# Altium PCB PCB1.PcbDoc
Units mil, origin at the board's own origin, x right, y up, seen from the top; angles counter-clockwise.
Board outline 6000 x 4000 mil, 2 copper layers (Top Layer, Bottom Layer); 12 components, 19 nets, 108 pads, 21 vias.
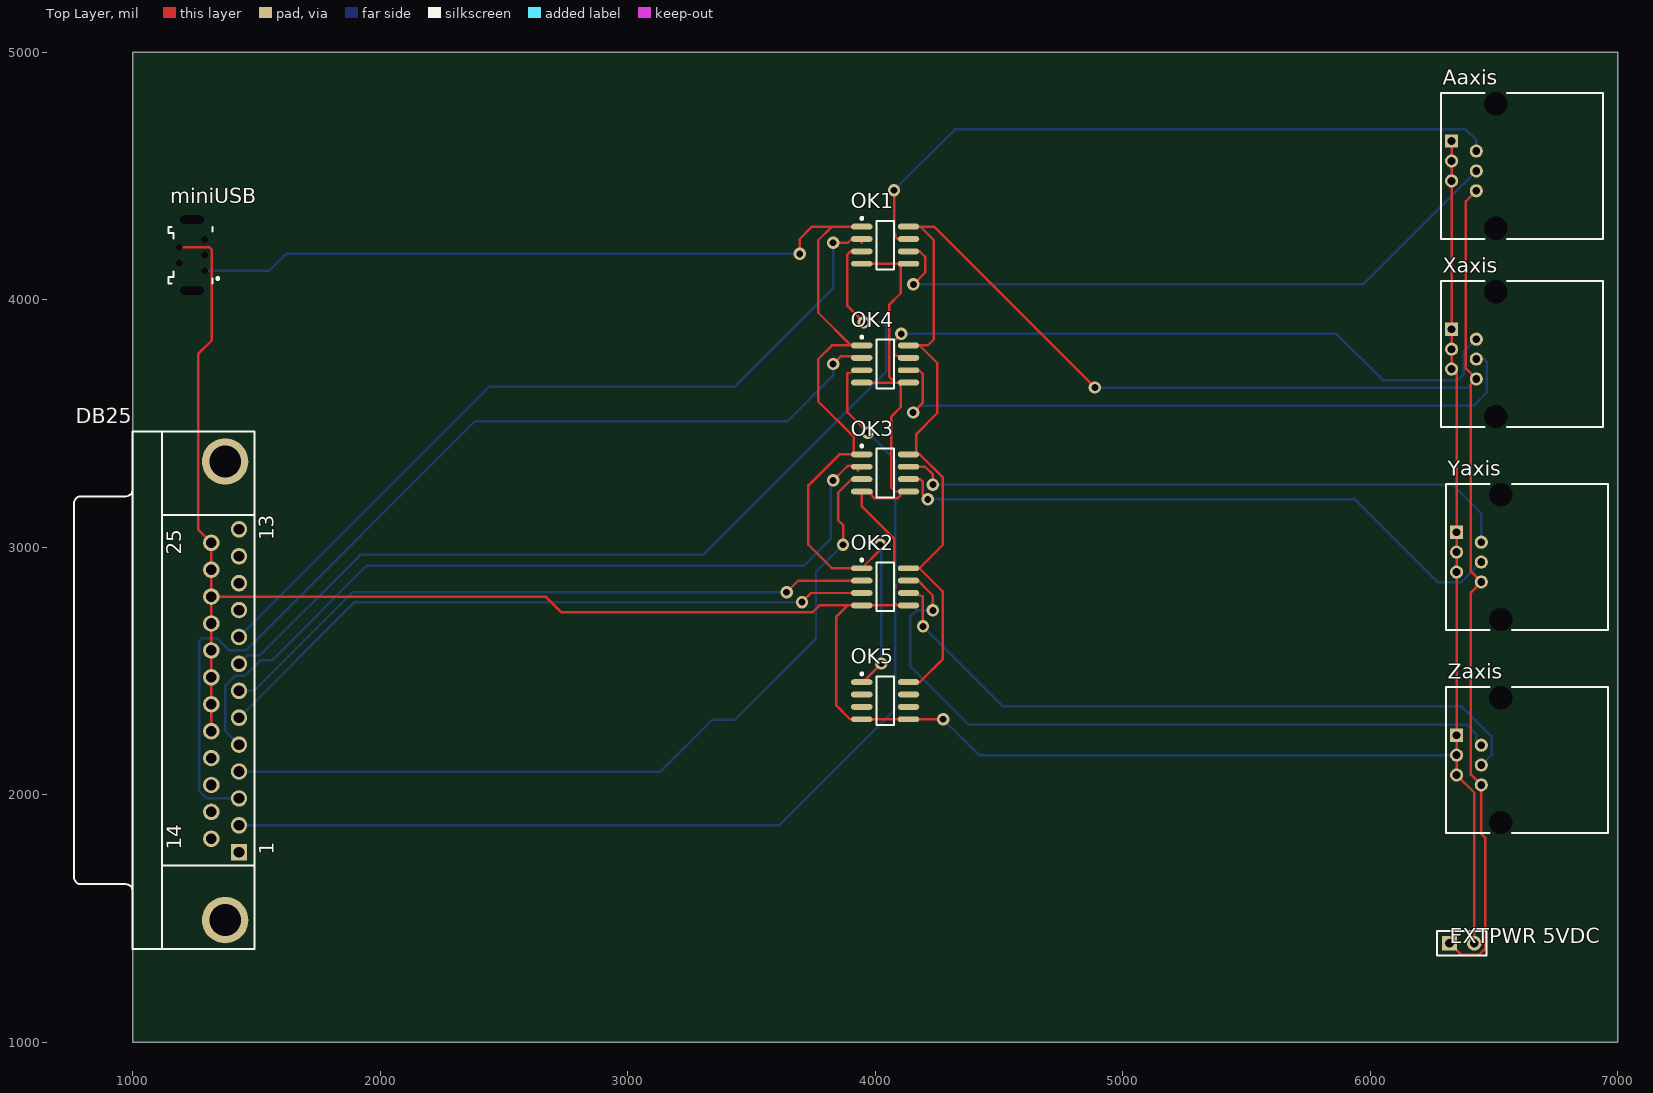
[diagram p0: Top Layer view]
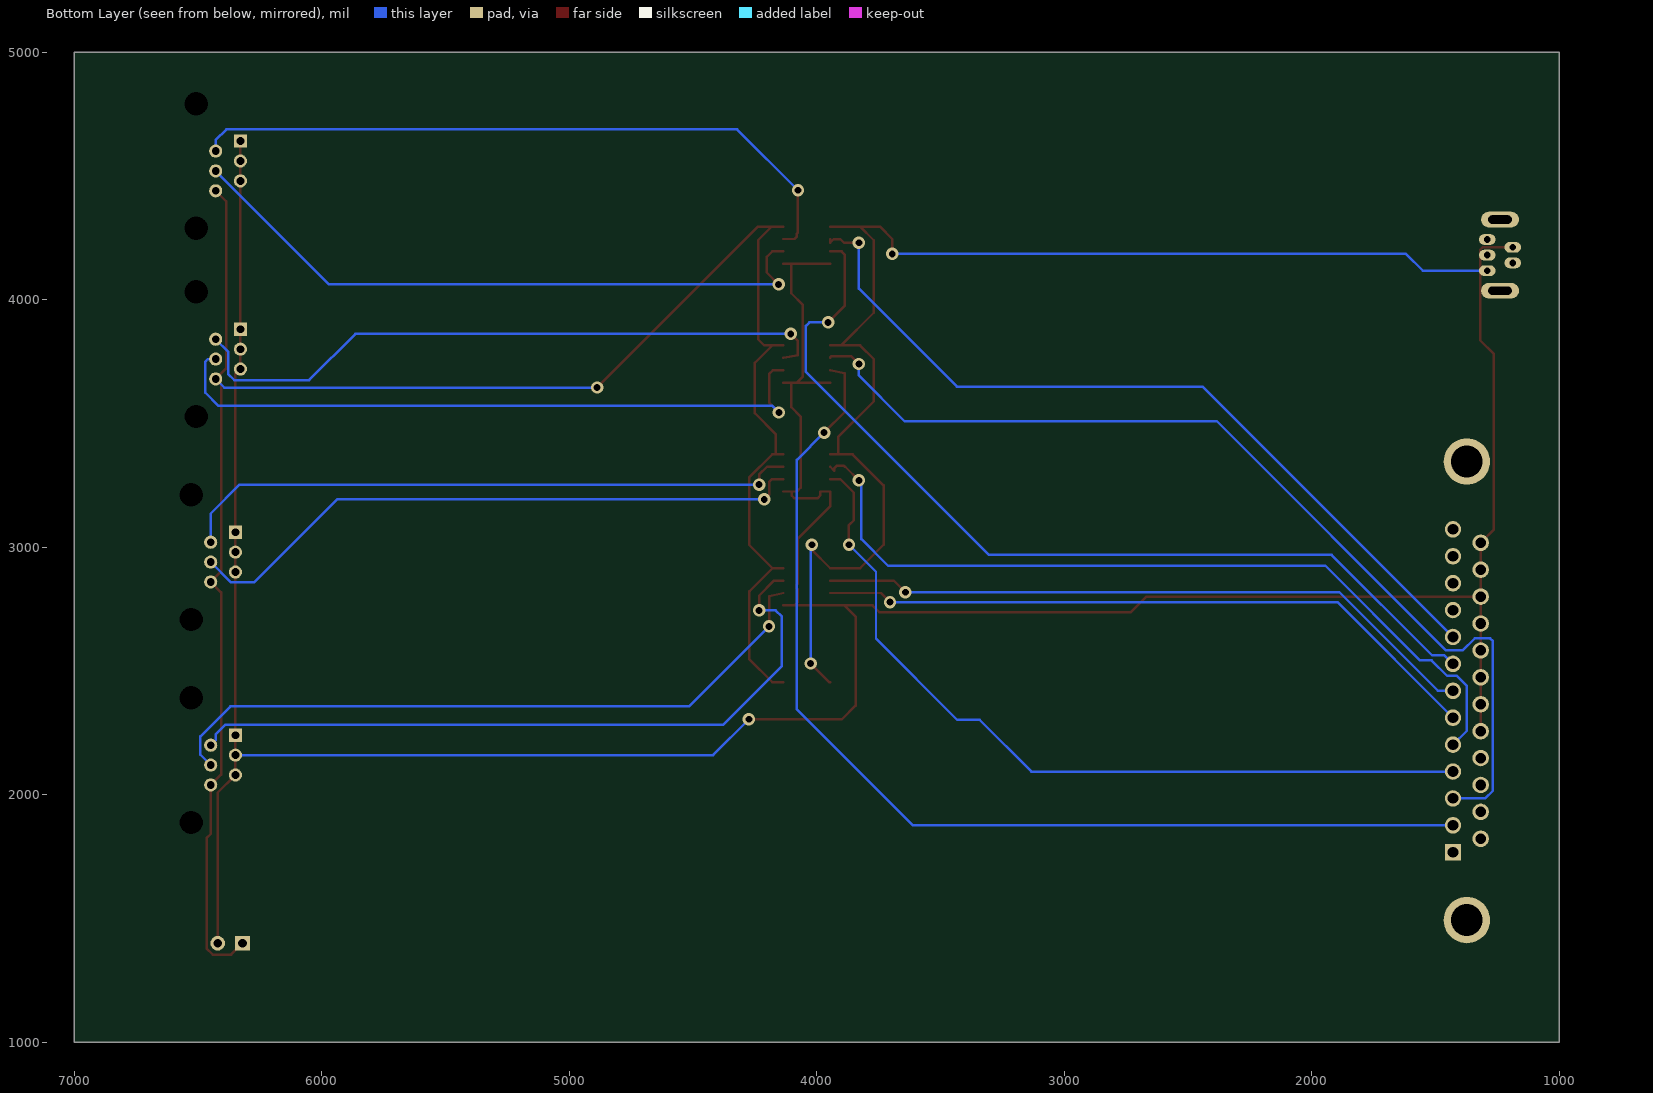
[diagram p1: Bottom Layer view, seen from below]

## Layer stack, top to bottom
Top Layer: signal copper 1.4
Dielectric: dielectric 12.6, FR-4, Dk 4.8
Bottom Layer: signal copper 1.4

## Board outline
1000,1000 7000,1000 7000,5000 1000,5000

## Design rules (kind name [scope] priority, off if disabled: settings)
Clearance [All] p1: gap=10
PolygonConnect [All] p1: connectstyle=Relief reliefconductorwidth=10 reliefentries=4 polygonreliefangle="90 Angle"
RoomDefinition Sheet1 [InComponentClass('Sheet1')] p1: confinementstyle=ConfineIn formatcopy=TRUE lockcomponents=FALSE outline 0,0 2000,0 2000,1000 0,1000
RoutingVias [All] p1: holewidth=28 width=50 viastyle="Through Hole" minholewidth=28 minwidth=50 maxholewidth=28 maxwidth=50
SilkscreenOverComponentPads [All] p1: minsilkscreentomaskgap=10
SolderMaskExpansion [All] p1: expansion=4
Width [All] p1: maxlimit=10 minlimit=10 preferedwidth=10
27 further rules are at their usual default settings.

## Components (designator, comment, footprint, x,y, rotation, side; value= is the part's Value field where it differs from the comment)
Aaxis "52830-6615" 52830-6615 6940,4540 r90 top
DB25 "D Connector 25" DSUB1.385-2H25A 1000,2420 r90 top
"EXTPWR 5VDC" "Header 2" HDR1X2 6320,1400 r0 top
miniUSB "5000750517" 5000750517 1240,4180 r90 top
OK1 "ADuM1200CRZ" R-8_N 4040,4220 r0 top
OK2 "ADuM1200CRZ" R-8_N 4040,2840 r0 top
OK3 "ADuM1200CRZ" R-8_N 4040,3300 r0 top
OK4 "ADuM1200CRZ" R-8_N 4040,3740 r0 top
OK5 "ADuM1200CRZ" R-8_N 4040,2380 r0 top
Xaxis "52830-6615" 52830-6615 6940,3780 r90 top
Yaxis "52830-6615" 52830-6615 6960,2960 r90 top
Zaxis "52830-6615" 52830-6615 6960,2140 r90 top

## Footprints (in the part's own frame and the unit in brackets; to place one, negate y for a bottom-side part, rotate by r counter-clockwise, add the part's x,y. Pads: shape width x height; smd on the part's side, far side on the other; paste and mask are expansions set on the pad)
52830-6615 [mm] "Connector; PCB Jack, Thru-Hole; 1-Port, 6 Positions, 6 Loaded; Unshielded without Lightpipes; Right Angle"
  rect 1.35x1.35 hole 0.8: 1(2.55,15.54)
  round 1.35 hole 0.8: 2(1.53,13) 3(0.51,15.54) 4(-0.51,13) 5(-1.53,15.54) 6(-2.55,13)
  round 2.1 hole 2.4 unplated: MH1(-6.4,11) MH2(6.4,11)
  silkscreen extent -7.5,0 7.5,16.62
5000750517 [mm] "Connector; USB Mini-B, Type 2, Thru-Hole; 5 Position; Vertical"
  round 0.4 / inner round 0.4 / far side oval 1.1x1.7 hole 0.7: 1(-1.6,-1.3) 2(-0.8,1.3) 3(0,-1.3) 4(0.8,1.3) 5(1.6,-1.3)
  oval 0.55x2.1 / inner oval 0.55x2.1 / far side oval 1.6x3.9 hole 0.85 slot 2.4 at 90 deg: 6(3.65,0) 7(-3.65,0)
  silkscreen extent -2.91,-2.77 2.91,2.4, body extent -3.85,-2.1 3.85,2.4, height 7.7
DSUB1.385-2H25A [mm] "Connector; D Subminiature; 25 Position; Right Angle; Pitch 1.385 mm"
  rect 1.69x1.69 hole 1.09: 1(-16.566,-10.92)
  round 1.69 hole 1.09: 2(-13.805,-10.92) 3(-11.044,-10.92) 4(-8.283,-10.92) 5(-5.522,-10.92) 6(-2.761,-10.92) 7(0,-10.92) 8(2.761,-10.92) 9(5.522,-10.92) 10(8.283,-10.92) 11(11.044,-10.92) 12(13.805,-10.92) 13(16.566,-10.92) 14(-15.185,-8.08) 15(-12.425,-8.08) 16(-9.663,-8.08) 17(-6.903,-8.08) 18(-4.142,-8.08) 19(-1.38,-8.08) 20(1.38,-8.08) 21(4.142,-8.08) 22(6.903,-8.08) 23(9.663,-8.08) 24(12.425,-8.08) 25(15.185,-8.08)
  round 4.76 hole 3.26: 26(-23.526,-9.5) 27(23.526,-9.5)
  silkscreen extent -26.5,-12.5 26.6,6
HDR1X2 [mm] "Connector; Header; 2 Position"
  rect 1.5x1.5 hole 0.9: 1(0,0)
  round 1.5 hole 0.9: 2(2.54,0)
  silkscreen extent -1.27,-1.27 3.81,1.27
R-8_N [mm] "8-Pin Narrow Body Small Outline Integrated Circuit 1.27 mm Pitch, IPC Medium Density"
  oval 2.2x0.6 smd: 1(-2.4,1.905) 2(-2.4,0.635) 3(-2.4,-0.635) 4(-2.4,-1.905) 5(2.4,-1.905) 6(2.4,-0.635) 7(2.4,0.635) 8(2.4,1.905)
  silkscreen extent -2.52,-2.5 0.9,2.88, body extent -1.95,-2.45 1.95,2.45, height 1.75

## Part data
Aaxis Xaxis Yaxis Zaxis: "Right Angle, Standard Profile, with Metal Peg PCB Jack"
DB25: "Receptacle Assembly, 25 Position, Right Angle"
"EXTPWR 5VDC": "Header, 2-Pin"
miniUSB: "USB On-The-Go (OTG) Mini-B Receptacle, Right Angle, Thru-Hole, 0.80mm (.031\") Pitch, Solder Tails & Shell Tabs with Dimples"
OK1: "iCoupler"

## Via types
v1: diameter 50, hole 28, Top Layer to Bottom Layer, 21 vias

## Nets (pads, with @x,y where several pads share a name; then routed paths per layer and width w, separated by ;. In a path a pad name is that pad's centre, name@x,y a point inside that pad or via, vN(x,y) a via of type N, cw(c..) or ccw(c..) an arc to the next point about the centre after c; other vN are vias at no path point)
"DRV +5V": "EXTPWR 5VDC.1" Aaxis.6 OK1.8 OK2.8 OK3.8 OK4.8 OK5.8 Xaxis.6 Yaxis.6 Zaxis.6 | length 8346.2
  Top Layer w10: OK5.8 4180,2455 4273,2548 4273,2822 4271,2822 4178,2915 ; OK2.8 4178,2915 ; v1(4887,3645) 4237,4295 4182,4295 ; 6320,1400 6366,1354 6440,1354 6465,1379 6465,1825 6448.19,1841.81 Zaxis.6 6406,2081.8 6406,2817.42 Yaxis.6 6406,2901.8 6406,3657.42 Xaxis.6 6386,3721.8 6386,4397.42 Aaxis.6 ; OK3.8@4166,3375 OK3.8 OK3.8@4166,3375 ; OK3.8@4166,3375 4180,3375 4273,3282 4273,3010 4178,2915 ; OK3.8@4166,3375 4166,3457 4250,3541 4250,3745 4180,3815 ; 4180,3815 OK4.8 4180,3815 ; 4180,3815 4212,3815 4237,3840 4237,4240 4182,4295 ; 4182,4295 OK1.8 4182,4295
  Bottom Layer w10: v1(4887,3645) 6393.58,3645 Xaxis.6
"DRV GND": "EXTPWR 5VDC.2" Aaxis.1 Aaxis.3 Aaxis.5 DB25.18 DB25.19 DB25.20 DB25.21 DB25.22 DB25.23 DB25.24 DB25.25 miniUSB.4 OK1.4 OK1.5 OK2.4 OK2.5 OK3.4 OK3.5 OK4.4 OK4.5 OK5.4 OK5.5 Xaxis.1 Xaxis.3 Xaxis.5 Yaxis.1 Yaxis.3 Yaxis.5 Zaxis.1 Zaxis.3 Zaxis.5 | length 13645.4
  Top Layer w10: miniUSB.4 1310,4211.5 1320,4201.5 1320,3835 1265,3780 1265,3070.96 DB25.25 DB25.24 DB25.23 ; DB25.18 DB25.19 DB25.20 DB25.21 DB25.22 DB25.23 ; OK4.4 4080,3665 ; OK1.4 OK1.5@4103,4145 ; v1(4274,2305) OK5.5 OK5.4 3898,2305 3843,2360 3843,2720 3888,2765 ; Aaxis.1 Aaxis.3 Aaxis.5 Xaxis.1 Xaxis.3 Xaxis.5 6348.19,3699.76 Yaxis.1 Yaxis.3 Yaxis.5 Zaxis.1 Zaxis.3 Zaxis.5 6420,2007.95 6420,1400 ; DB25.23 2668.55,2800.45 2731.11,2737.89 3747.38,2737.89 3774.49,2765 3888,2765 ; 3888,2765 OK2.4 ; 3888,2765 OK2.4 ; OK2.4 4090,2765 ; OK3.4@3946,3225 OK3.4 OK3.4@3946,3225 ; OK3.4@3946,3225 3946,3165 4076,3035 4076,2854.08 4080,2850.08 4080,2833.43 4076,2829.43 4076,2779 4090,2765 ; OK3.4@3946,3225 3985,3225 3985,3210 3997.64,3197.36 4090,3197.36 4100.6,3207.96 OK3.5@4100.6,3225 ; 4080,3665 OK4.5@4103,3665 ; 4080,3665 4056.18,3688.82 4056.18,3979.18 4103,4026 OK1.5@4103,4145 ; 4080,3665 OK4.5@4103,3665 ; 4090,2765 OK2.5 4090,2765 ; OK3.5@4100.6,3225 OK3.5 OK3.5@4100.6,3225 ; OK3.5@4100.6,3225 4080,3225 4065,3240 4065,3528 4103,3566 OK4.5@4103,3665 ; OK4.5@4103,3665 OK4.5 ; OK4.5@4103,3665 OK4.5 ; OK4.5@4103,3665 OK4.5 ; OK1.5@4103,4145 OK1.5 OK1.5@4103,4145
  Bottom Layer w10: v1(4274,2305) 4418.92,2160.08 Zaxis.3
NetAaxis_2: Aaxis.2 OK1.7 | length 2763.8
  Top Layer w10: v1(4076,4442) 4076,4270.57 4080,4266.57 4080,4255 4090,4245 OK1.7
  Bottom Layer w10: v1(4076,4442) 4322,4688 6385,4688 6428.19,4644.81 Aaxis.2
NetAaxis_4: Aaxis.4 OK1.6 | length 2671.4
  Top Layer w10: OK1.6 4180,4195 4202,4173 4202,4110 v1(4154,4062)
  Bottom Layer w10: v1(4154,4062) 5970.27,4062 Aaxis.4
NetDB25_2: DB25.2 OK4.3 | length 4341
  Top Layer w10: OK4.3 3887,3702 3887,3546 v1(3970,3463)
  Bottom Layer w10: DB25.2 3611.5,1876.5 4080,2345 4080,3353 v1(3970,3463)
NetDB25_3: DB25.3 OK4.2 | length 4004.1
  Top Layer w10: v1(3830,3740) 3862.13,3772.13 3941.38,3772.13 3945.51,3767.99 OK4.2
  Bottom Layer w10: DB25.3 1300,1985.2 1269,2016.2 1269,2621 1280,2632 1342,2632 1391,2583 1457.69,2583 2383.69,3509 3645,3509 3830,3694 v1(3830,3740)
NetDB25_4: DB25.4 OK3.3 | length 3314.3
  Top Layer w10: v1(3870,3010) 3870,3089 3850,3109 3850,3220 3905,3275 OK3.3
  Bottom Layer w10: DB25.4 3132.9,2093.9 3342.17,2303.17 3433.17,2303.17 3760.72,2630.72 3760.72,2900.72 v1(3870,3010)
NetDB25_5: DB25.5 OK3.2 | length 3353.7
  Top Layer w10: v1(3830,3270) 3884.84,3324.84 3887.2,3324.84 3892.36,3330 3918.13,3330 3930,3318.13 3930,3309.49 OK3.2
  Bottom Layer w10: DB25.5 1374,2258.52 1374,2440 1414,2480 1453,2480 1516,2543 1563,2543 1945,2925 3712,2925 3820,3033 3820,3260 v1(3830,3270)
NetDB25_6: DB25.6 OK2.3 | length 2724.2
  Top Layer w10: v1(3704,2778) 3741,2815 OK2.3
  Bottom Layer w10: DB25.6 1896.62,2778 v1(3704,2778)
NetDB25_7: DB25.7 OK2.2 | length 2699.9
  Top Layer w10: v1(3642,2818) 3689,2865 OK2.2
  Bottom Layer w10: DB25.7 1490.68,2420 1888.68,2818 v1(3642,2818)
NetDB25_8: DB25.8 OK1.3 | length 3749.8
  Top Layer w10: OK1.3 3900,4195 3887.2,4182.2 3887.2,3974.8 v1(3954,3908)
  Bottom Layer w10: DB25.8 1464.22,2563 1513.9,2563 1919.9,2969 3305,2969 4044,3708 4044,3894 4030,3908 v1(3954,3908)
NetDB25_9: DB25.9 OK1.2 | length 3309.7
  Top Layer w10: v1(3830,4230) 3890,4230 3904.21,4244.21 3931.81,4244.21 3945.51,4230.51 OK1.2
  Bottom Layer w10: DB25.9 2441.11,3648.59 3433.59,3648.59 3830,4045 v1(3830,4230)
NetOK2_6: OK2.6 Zaxis.4 | length 2796.4
  Top Layer w10: OK2.6 4192.8,2802.2 v1(4192.8,2680)
  Bottom Layer w10: v1(4192.8,2680) 4515.8,2357 6369,2357 6490,2236 6490,2161.73 Zaxis.4
NetOK2_7: OK2.7 Zaxis.2 | length 2938.6
  Top Layer w10: OK2.7 4172,2865 4233,2804 v1(4233,2745)
  Bottom Layer w10: v1(4233,2745) 4166,2745 4141,2720 4141,2520 4379,2282 6390,2282 6427,2245 6427,2221.43 Zaxis.2
NetOK3_6: OK3.6 Yaxis.4 | length 2550.2
  Top Layer w10: OK3.6 4180.98,3275 4192.8,3263.19 4192.8,3212.2 v1(4212,3193)
  Bottom Layer w10: v1(4212,3193) 5938,3193 6273,2858 6366.27,2858 Yaxis.4
NetOK3_7: OK3.7 Yaxis.2 | length 2531.2
  Top Layer w10: OK3.7 4201,3325 4233,3293 v1(4233,3253)
  Bottom Layer w10: v1(4233,3253) 6331.19,3253 6448.19,3136 Yaxis.2
NetOK4_6: OK4.6 Xaxis.4 | length 2758.6
  Top Layer w10: OK4.6 4177,3715 4192.8,3699.2 4192.8,3583.8 v1(4153,3544)
  Bottom Layer w10: v1(4153,3544) 4181,3572 6418,3572 6470,3624 6470,3749.92 6460,3759.92 Xaxis.4
NetOK4_7: OK4.7 Xaxis.2 | length 2680.1
  Top Layer w10: v1(4105,3862) 4076.18,3833.18 4076.18,3774.82 OK4.7
  Bottom Layer w10: v1(4105,3862) 5864,3862 6051,3675 6353,3675 6378,3700 6378,3790.05 Xaxis.2
"VCC +5V": miniUSB.1 OK1.1 OK2.1 OK3.1 OK4.1 OK5.1 | length 5596.3
  Top Layer w10: v1(3695,4185) 3695,4245 3745,4295 3899,4295 OK1.1 3825,4295 3770,4240 3770,3947 3902,3815 ; OK5.1 3950,2455 v1(4025,2530) ; OK4.1 3825,3815 3770,3760 3770,3589 3914,3445 OK3.1@3914,3375 ; v1(4020,3010) 4020,2989.49 OK2.1 3825,2915 3730,3010 3730,3250 3855,3375 OK3.1@3914,3375 ; OK3.1@3914,3375 OK3.1 OK3.1@3914,3375
  Bottom Layer w10: miniUSB.1 1552.01,4117.01 1620,4185 v1(3695,4185) ; v1(4020,3010) 4025,3005 v1(4025,2530)
pads on no net: Aaxis.MH1 Aaxis.MH2 DB25.1 DB25.10 DB25.11 DB25.12 DB25.13 DB25.14 DB25.15 DB25.16 DB25.17 DB25.26 DB25.27 miniUSB.2 miniUSB.3 miniUSB.5 miniUSB.6 miniUSB.7 OK5.2 OK5.3 OK5.6 OK5.7 Xaxis.MH1 Xaxis.MH2 Yaxis.MH1 Yaxis.MH2 Zaxis.MH1 Zaxis.MH2

## Text inside footprints (layer, text, board x,y; h text height)
DB25: Top Overlay "1" at 1569.88,1757.95 h59.06 r90; Top Overlay "13" at 1569.88,3027.91 h59.06 r90; Top Overlay "14" at 1195.87,1777.85 h59.06 r90; Top Overlay "25" at 1195.87,2968.64 h59.06 r90